# Altium PCB RF-Test-Board-Pcb.PcbDoc
Units mm, origin at the board's own origin, x right, y up, seen from the top; angles counter-clockwise.
Board outline 50 x 100 mm, 4 copper layers (Top Layer, GND, Power, Bottom Layer), stack 1.572 mm thick; 98 components, 45 nets, 257 pads, 494 vias.
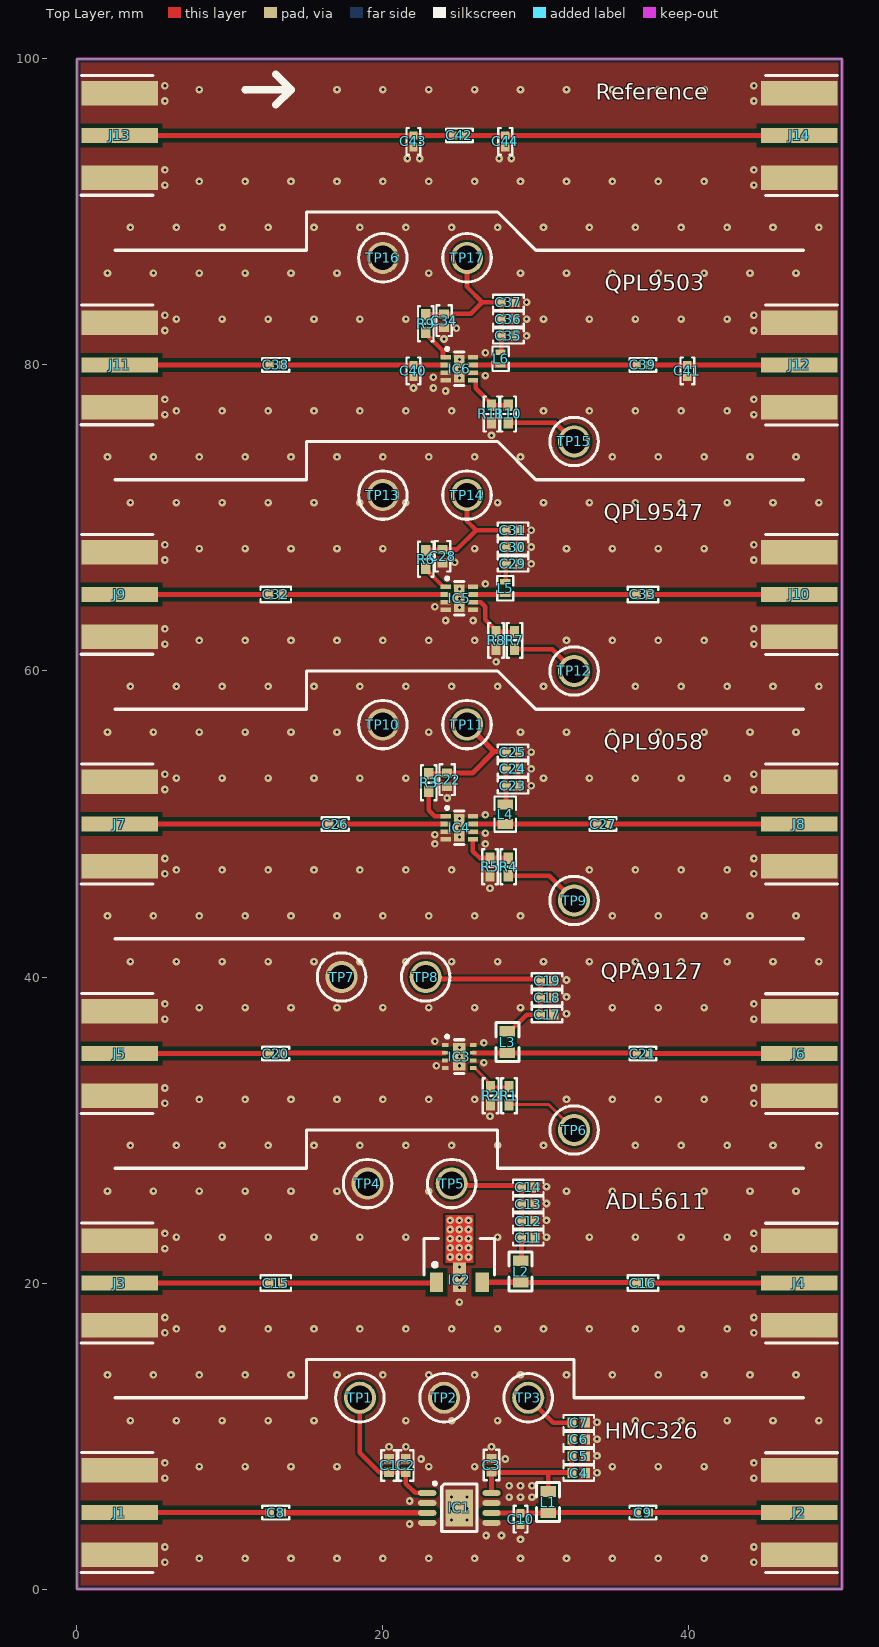
[diagram p0: Top Layer view]
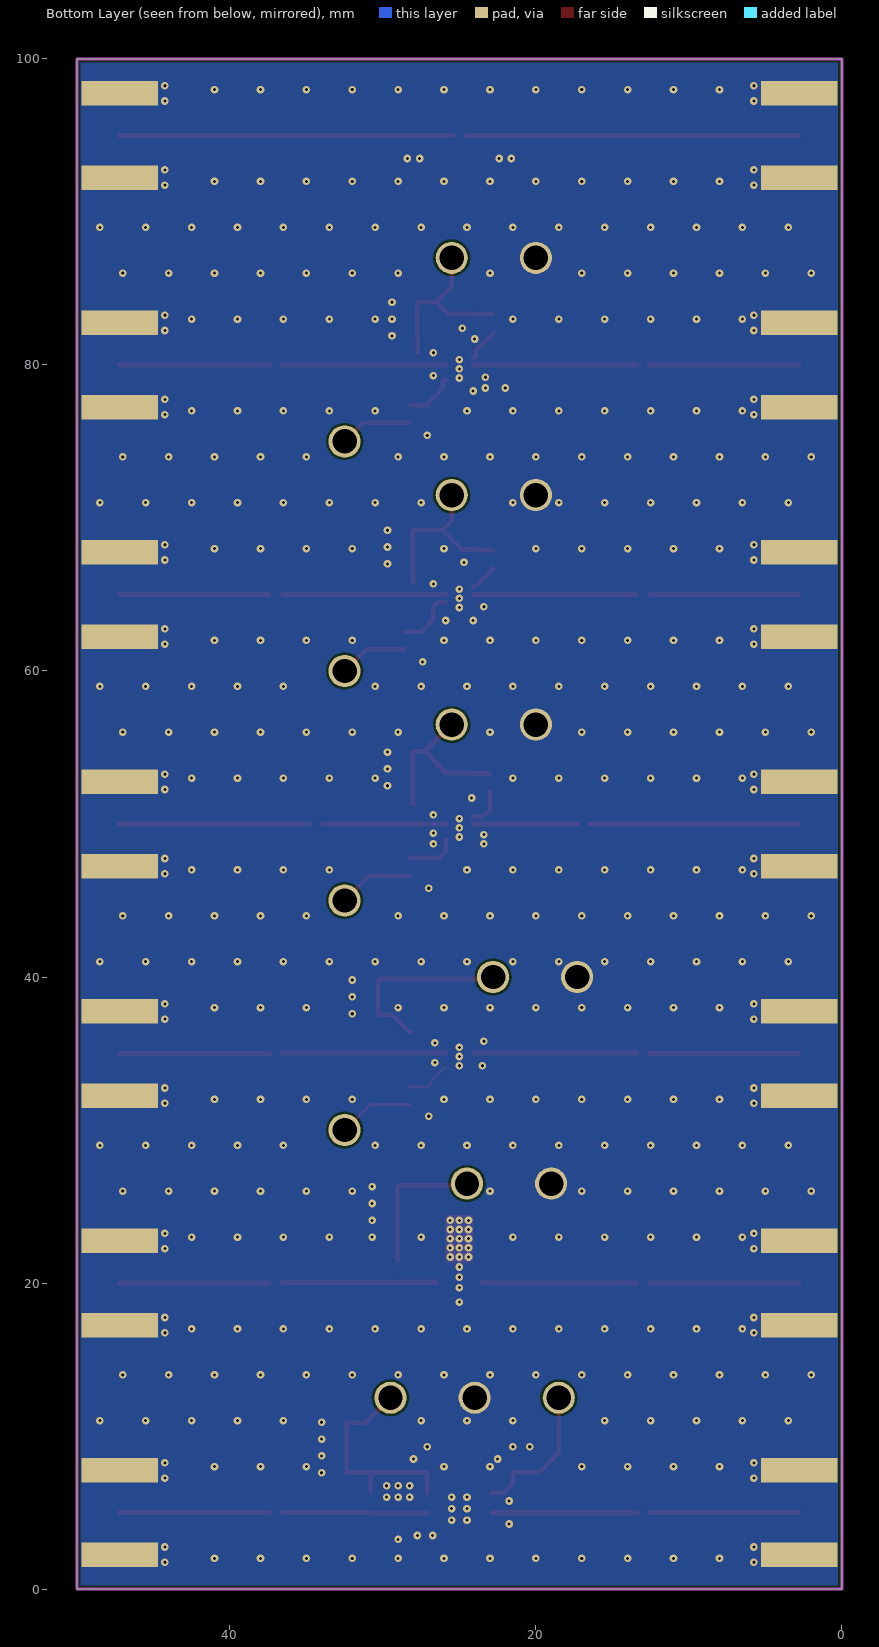
[diagram p1: Bottom Layer view, seen from below]
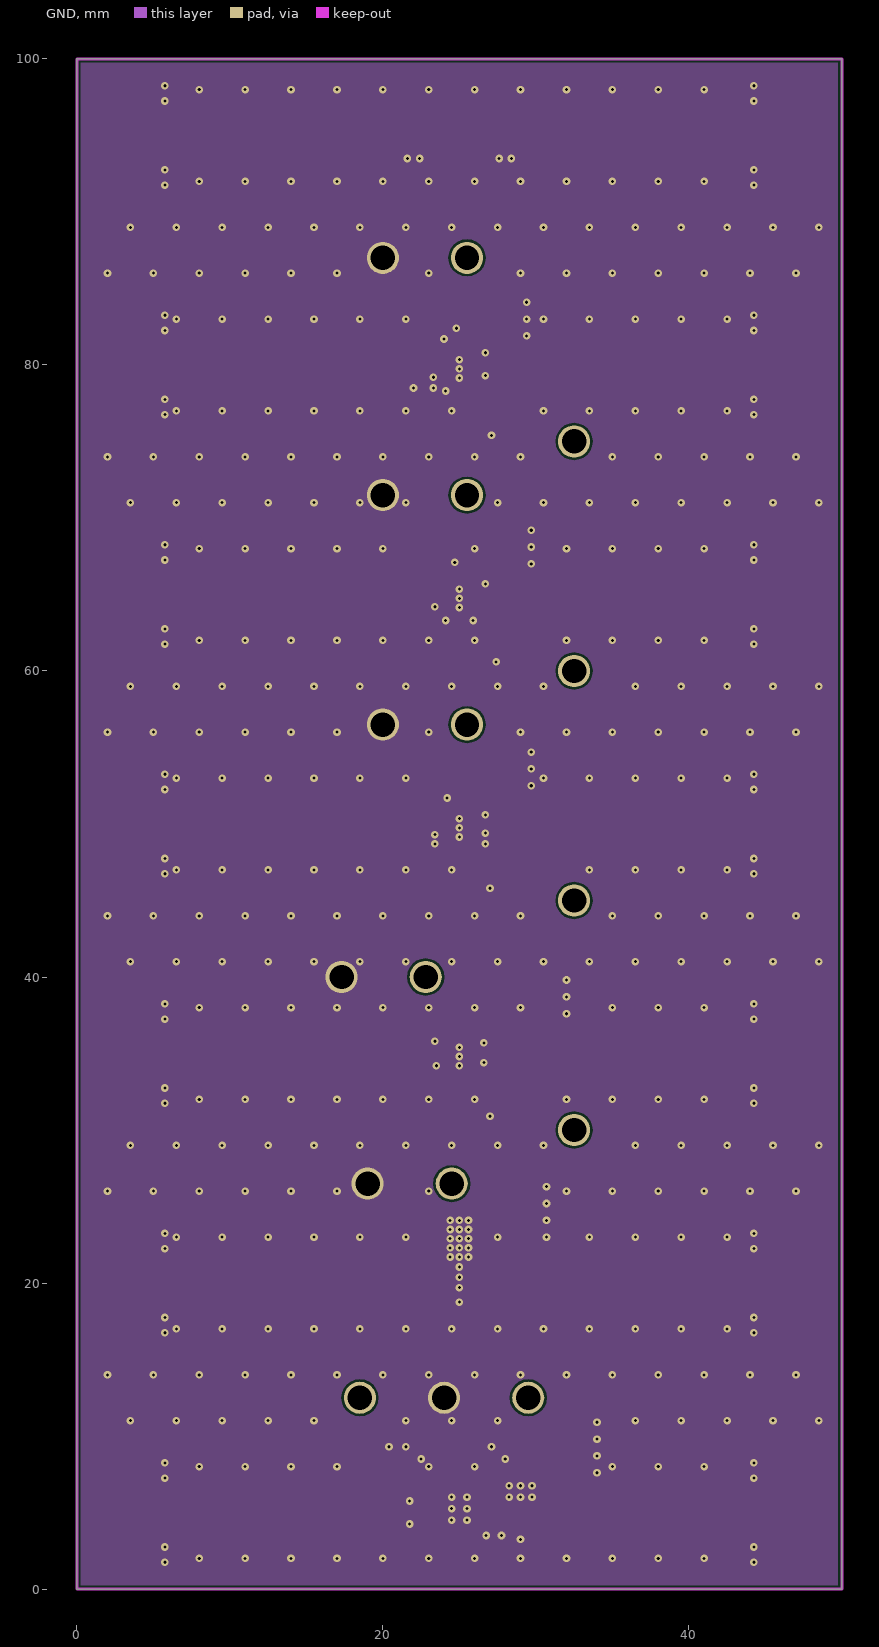
[diagram p2: GND]

## Layer stack, top to bottom
Top Solder: solder mask 0.0203, JLCPCB-SolderMask, Dk 3.8
Top Layer: signal copper 0.0356
Dielectric 2: prepreg 0.2, JLC7628, Dk 4.6
GND: signal copper 0.018
Dielectric 1: core 1.065, JLPCB-CORE, Dk 4.6
Power: signal copper 0.018
Dielectric 3: prepreg 0.2, JLC7628, Dk 4.6
Bottom Layer: signal copper 0.0356
Bottom Solder: solder mask 0.0203, JLCPCB-SolderMask, Dk 3.8

## Board outline
0,0 50,0 50,100 0,100

## Design rules (kind name [scope] priority, off if disabled: settings)
BoardOutlineClearance [All] p1: gap=0.15 ignorepadtopadclearanceinfootprint=FALSE
Clearance Clearance_RF [InNetClass('RF_50Z')] p1: gap=0.15 ignorepadtopadclearanceinfootprint=FALSE except(0.3: Arc-Fill Arc-Poly Arc-Region Track-Fill Track-Poly Track-Region SMDPad-Fill SMDPad-Poly SMDPad-Region THPad-Fill THPad-Poly THPad-Region Via-Fill Via-Poly Via-Region Fill-Fill Fill-Poly Fill-Region Poly-Poly Poly-Region Region-Region)
Clearance [All] p2: gap=0.15 ignorepadtopadclearanceinfootprint=FALSE
HoleSize [All] p1: absolutevalues=TRUE maxlimit=6.3 minlimit=0.2 maxpercent=80.000 minpercent=20.000
HoleToHoleClearance [All] p1: gap=0.25 allowstackedmicrovias=TRUE
MinimumSolderMaskSliver [All] p1: minsoldermaskwidth=0.03
PlaneClearance [All] p1: clearance=0.25
PlaneConnect [All] p1: planeconnectstyle=Direct reliefexpansion=0.508 reliefentries=4 reliefconductorwidth=0.254 reliefairgap=0.254
PolygonConnect [All] p1: connectstyle=Direct reliefconductorwidth=0.254 reliefentries=4 polygonreliefangle="90 Angle" airgapwidth=0.254
RoutingVias [All] p1: holewidth=0.2 width=0.5 viastyle="Through Hole" minholewidth=0.2 minwidth=0.5 maxholewidth=0.5 maxwidth=0.8
SilkToSolderMaskClearance [IsPad] p1: minsilkscreentomaskgap=0.05 clearancetoexposedcopper=TRUE
SolderMaskExpansion [All] p1: expansion=0.1 istentingtop=FALSE
Width Width_RF [InNetClass('RF_50Z')] p1: maxlimit=0.33 minlimit=0.254 preferedwidth=0.33 toplayer_minwidth=0.33 bottomlayer_minwidth=0.33 impedanceprofiledriven=TRUE impedanceprofileid={54A6BA53-0861-47FA-A180-C08008A3F4AD} impedanceprofilevalue=50.000000 minimp=50.000000 maximp=50.000000 favimp=50.000000
Width [All] p2: maxlimit=5 minlimit=0.15 preferedwidth=0.2
24 further rules are at their usual default settings.

## Classes and differential pairs
component class RF-Test-Board-Sch: C42 C43 C44 J13 J14
net class RF_50Z: NetC8_1 NetC8_2 NetC9_1 NetC9_2 NetC15_1 NetC15_2 NetC16_1 NetC16_2 NetC20_1 NetC20_2 NetC21_1 NetC21_2 NetC26_1 NetC26_2 NetC27_1 NetC27_2 NetC32_1 NetC32_2 NetC33_1 NetC33_2 NetC38_1 NetC38_2 NetC39_1 NetC39_2 NetC42_1 NetC42_2
component class U_QPL9547: C28 C29 C30 C31 C32 C33 IC5 J9 J10 L5 R6 R7 R8 TP12 TP13 TP14
component class U_QPL9503: C34 C35 C36 C37 C38 C39 C40 C41 IC6 J11 J12 L6 R9 R10 R11 TP15 TP16 TP17
component class U_QPL9058: C22 C23 C24 C25 C26 C27 IC4 J7 J8 L4 R3 R4 R5 TP9 TP10 TP11
component class U_QPA9127: C17 C18 C19 C20 C21 IC3 J5 J6 L3 R1 R2 TP6 TP7 TP8
component class U_HMC326: C1 C2 C3 C4 C5 C6 C7 C8 C9 C10 IC1 J1 J2 L1 TP1 TP2 TP3
component class U_ADL5611: C11 C12 C13 C14 C15 C16 IC2 J3 J4 L2 TP4 TP5

## Components (designator, comment, footprint, x,y, rotation, side; value= is the part's Value field where it differs from the comment)
C1 "0.1µF" "CAP 0402_1005" 20.4,8.075 r270 top
C2 "330pF" "CAP 0402_1005" 21.5,8.075 r270 top
C3 "330pF" "CAP 0402_1005" 27.1,8.1 r270 top
C4 "330pF" "CAP 0402_1005" 32.8,7.575 r180 top
C5 "0.1µF" "CAP 0402_1005" 32.8,8.675 r180 top
C6 "2.2µF" "CAP 0402_1005" 32.8,9.775 r180 top
C7 "2.2µF" "CAP 0402_1005" 32.8,10.875 r180 top
C8 "3pF" "CAP 0402_1005 RF" 13,5 r180 top
C9 "3pF" "CAP 0402_1005 RF" 37,5 r0 top
C10 "0.7pF" "CAP 0402_1005 RF" 29,4.575 r90 top
C11 "68pF" "CAP 0402_1005" 29.5,22.95 r180 top
C12 "1200pF" "CAP 0402_1005" 29.5,24.05 r180 top
C13 "0.1µF" "CAP 0402_1005" 29.5,25.15 r180 top
C14 "1µF" "CAP 0402_1005" 29.5,26.25 r180 top
C15 "0.1µF" "CAP 0402_1005" 13,20 r180 top
C16 "0.1µF" "CAP 0402_1005" 37,20 r180 top
C17 "1000pF" "CAP 0402_1005" 30.734,37.541 r180 top
C18 "0.1µF" "CAP 0402_1005" 30.734,38.641 r180 top
C19 "1µF" "CAP 0402_1005" 30.734,39.741 r180 top
C20 "10pF" "CAP 0402_1005 RF" 13,35 r0 top
C21 "10pF" "CAP 0402_1005 RF" 37,35 r0 top
C22 "1000pF" "CAP 0402_1005" 24.2,52.9 r270 top
C23 "1000pF" "CAP 0402_1005" 28.5,52.5 r180 top
C24 "0.1µF" "CAP 0402_1005" 28.5,53.6 r180 top
C25 "1µF" "CAP 0402_1005" 28.5,54.7 r180 top
C26 "15pF" "CAP 0402_1005 RF" 16.89,50 r0 top
C27 "15pF" "CAP 0402_1005 RF" 34.39,50 r0 top
C28 "100pF" "CAP 0402_1005" 23.9,67.5 r90 top
C29 "100pF" "CAP 0402_1005" 28.5,67 r180 top
C30 "0.1µF" "CAP 0402_1005" 28.5,68.1 r180 top
C31 "1µF" "CAP 0402_1005" 28.5,69.2 r180 top
C32 "100pF" "CAP 0402_1005" 13,65 r0 top
C33 "100pF" "CAP 0402_1005" 37,65 r0 top
C34 "100pF" "CAP 0402_1005" 24,82.9 r270 top
C35 "100pF" "CAP 0402_1005" 28.2,81.9 r180 top
C36 "0.1µF" "CAP 0402_1005" 28.2,83 r180 top
C37 "1µF" "CAP 0402_1005" 28.2,84.1 r180 top
C38 "10pF" "CAP 0402_1005 RF" 13,80 r0 top
C39 "5.6pF" "CAP 0402_1005 RF" 37,80 r0 top
C40 "0.2pF" "CAP 0402_1005 RF" 22,79.61 r90 top
C41 "0.4pF" "CAP 0402_1005 RF" 39.9,79.61 r90 top
C42 "3pF" "CAP 0402_1005 RF" 25,95 r180 top
C43 "3pF" "CAP 0402_1005 RF" 22,94.61 r90 top
C44 "3pF" "CAP 0402_1005 RF" 28,94.61 r90 top
IC1 "HMC326MS8GE" "ANALOG MSOP8G 3x3MM" 25,5.3 r0 top
IC2 "ADL5611" "Analog SOT-89" 25,20.5 r0 top
IC3 "QPA9127" "Qorvo PA DFN-8 2X2" 25,34.8 r0 top
IC4 "QPL9058" "Qorvo LNA DFN-8 2X2" 25,49.75 r270 top
IC5 "QPL9547" "Qorvo LNA DFN-8 2X2" 25,64.75 r270 top
IC6 "QPL9503" "Qorvo LNA DFN-8 2X2" 25,79.75 r270 top
J1 "CON-SMA-EDGE-S" CON-SMA-EDGE-S 0,5 r90 top
J2 "CON-SMA-EDGE-S" CON-SMA-EDGE-S 50,5 r270 top
J3 "CON-SMA-EDGE-S" CON-SMA-EDGE-S 0,20 r90 top
J4 "CON-SMA-EDGE-S" CON-SMA-EDGE-S 50,20 r270 top
J5 "CON-SMA-EDGE-S" CON-SMA-EDGE-S 0,35 r90 top
J6 "CON-SMA-EDGE-S" CON-SMA-EDGE-S 50,35 r270 top
J7 "CON-SMA-EDGE-S" CON-SMA-EDGE-S 0,50 r90 top
J8 "CON-SMA-EDGE-S" CON-SMA-EDGE-S 50,50 r270 top
J9 "CON-SMA-EDGE-S" CON-SMA-EDGE-S 0,65 r90 top
J10 "CON-SMA-EDGE-S" CON-SMA-EDGE-S 50,65 r270 top
J11 "CON-SMA-EDGE-S" CON-SMA-EDGE-S 0,80 r90 top
J12 "CON-SMA-EDGE-S" CON-SMA-EDGE-S 50,80 r270 top
J13 "CON-SMA-EDGE-S" CON-SMA-EDGE-S 0,95 r90 top
J14 "CON-SMA-EDGE-S" CON-SMA-EDGE-S 50,95 r270 top
L1 "3.3nH" 0603HP 30.8,5.675 r90 top
L2 "43nH" 0603HP 29,20.75 r90 top
L3 "12nH" 0603HP 28.134,35.741 r90 top
L4 "18nH" 0603CS 28,50.64 r90 top
L5 "18nH" 0402CS 28,65.41 r90 top
L6 "18nH" 0402CS 27.7,80.41 r90 top
R1 "=Value" "RES 0402_1005" 28.244,32.241 r90 top
R2 "220 kOhms" "RES 0402_1005" 27.044,32.241 r90 top
R3 "3.83 kOhms" "RES 0402_1005" 23,52.7 r90 top
R4 "=Value" "RES 0402_1005" 28.2,47.2 r90 top
R5 "220 kOhms" "RES 0402_1005" 27,47.2 r90 top
R6 "3.32 kOhms" "RES 0402_1005" 22.8,67.3 r90 top
R7 "=Value" "RES 0402_1005" 28.6,62 r90 top
R8 "100 kOhms" "RES 0402_1005" 27.4,62 r90 top
R9 "4.3 kOhms" "RES 0402_1005" 22.8,82.7 r90 top
R10 "=Value" "RES 0402_1005" 28.2,76.8 r90 top
R11 "20 kOhms" "RES 0402_1005" 27.1,76.8 r90 top
TP1 "Test Point-THM" KEYSTONE-THM-TestPoint 18.5,12.5 r0 top
TP2 "Test Point-THM" KEYSTONE-THM-TestPoint 24,12.5 r0 top
TP3 "Test Point-THM" KEYSTONE-THM-TestPoint 29.5,12.5 r0 top
TP4 "Test Point-THM" KEYSTONE-THM-TestPoint 19,26.5 r0 top
TP5 "Test Point-THM" KEYSTONE-THM-TestPoint 24.5,26.5 r0 top
TP6 "Test Point-THM" KEYSTONE-THM-TestPoint 32.5,30 r0 top
TP7 "Test Point-THM" KEYSTONE-THM-TestPoint 17.3,40 r0 top
TP8 "Test Point-THM" KEYSTONE-THM-TestPoint 22.8,40 r0 top
TP9 "Test Point-THM" KEYSTONE-THM-TestPoint 32.5,45 r0 top
TP10 "Test Point-THM" KEYSTONE-THM-TestPoint 20,56.5 r0 top
TP11 "Test Point-THM" KEYSTONE-THM-TestPoint 25.5,56.5 r0 top
TP12 "Test Point-THM" KEYSTONE-THM-TestPoint 32.5,60 r0 top
TP13 "Test Point-THM" KEYSTONE-THM-TestPoint 20,71.5 r0 top
TP14 "Test Point-THM" KEYSTONE-THM-TestPoint 25.5,71.5 r0 top
TP15 "Test Point-THM" KEYSTONE-THM-TestPoint 32.5,75 r0 top
TP16 "Test Point-THM" KEYSTONE-THM-TestPoint 20,87 r0 top
TP17 "Test Point-THM" KEYSTONE-THM-TestPoint 25.5,87 r0 top

## Footprints (in the part's own frame and the unit in brackets; to place one, negate y for a bottom-side part, rotate by r counter-clockwise, add the part's x,y. Pads: shape width x height; smd on the part's side, far side on the other; paste and mask are expansions set on the pad)
0402CS [mm] "Coilcraft Chip Inductor"
  rect 0.36x0.66 smd: 1(-0.41,0) 2(0.41,0)
  silkscreen extent -0.8,-0.53 0.8,0.53, body extent -0.59,-0.32 0.59,0.32, height 0.65
0603CS [mm] "Coilcraft Chip Inductor"
  rect 0.64x1.02 smd: 1(-0.64,0) 2(0.64,0)
  silkscreen extent -1.15,-0.7 1.15,0.7, body extent -0.9,-0.56 0.9,0.56, height 1.01
0603HP [mm] "Coilcraft Chip Inductor"
  rect 0.69x1.02 smd: 1(-0.7,0) 2(0.7,0)
  silkscreen extent -1.28,-0.75 1.28,0.75, body extent -0.88,-0.54 0.87,0.55, height 0.93
"ANALOG MSOP8G 3x3MM" [mm] "MSOP, 8-Leads, Body 3.00x3.00mm, Pitch 0.65mm, IPC Medium Density"
  oval 1.2x0.38 smd: 1(-2.1,0.975) 2(-2.1,0.325) 3(-2.1,-0.325) 4(-2.1,-0.975) 5(2.1,-0.975) 6(2.1,-0.325) 7(2.1,0.325) 8(2.1,0.975)
  rect 1.78x2.41 smd: 2(0,0)
  silkscreen extent -1.7,-1.55 1.15,1.7, body extent -2.46,-1.5 2.46,1.5, height 0.96
"Analog SOT-89" [mm] "SOT89, 3-Leads, Body 4.50x2.50mm, Pitch 1.50mm, Lead Span 3.3mm, IPC Medium Density"
  rect 0.86x1.3 smd: 1(-1.5,-0.45) 3(1.5,-0.45)
  rect 0.86x1.95 smd: 2(0,-0.125)
  Top Layer region: -0.9,0.825 -0.9,3.925 0.9,3.925 0.9,0.825
  silkscreen extent -2.3,0.02 2.3,2.4, body extent -2.25,-0.87 2.25,3.28, height 1.5
"CAP 0402_1005" [mm] "Chip Capacitor, 2-Leads, Body 1.02x0.51mm, IPC Medium Density"
  rect 0.6x0.64 smd: 1(-0.44,0) 2(0.44,0)
  silkscreen extent -1,-0.5 1,0.5, body extent -0.5,-0.26 0.5,0.26, height 0.52
"CAP 0402_1005 RF" [mm] "Chip Capacitor, 2-Leads, Body 1.02x0.51mm, IPC High Density"
  rect 0.55x0.54 smd: 1(-0.39,0) 2(0.39,0)
  silkscreen extent -0.87,-0.45 0.87,0.45, body extent -0.5,-0.26 0.5,0.26, height 0.52
CON-SMA-EDGE-S [mm]
  rect 1x5 smd: 1(0,-2.8)
  rect 1.6x5 smd: 2(-2.77,-2.8) 2(2.77,-2.8)
  rect 1.6x5 smd far side: 2(-2.77,-2.8) 2(2.77,-2.8)
  silkscreen extent -3.91,-4.99 3.93,-0.29, body extent -3.17,-3.77 3.18,9.56, height 3.55
KEYSTONE-THM-TestPoint [mm] "Test Point, Dia 3.17mm"
  round 2.1 hole 1.6: 1(0,0)
  silkscreen extent -1.59,-1.58 1.59,1.58, body extent -1.59,-1.59 1.59,1.59, height 8.13
"Qorvo LNA DFN-8 2X2" [mm] "DFN-8, 8-Leads, Body 2x2mm, Pitch 0.5mm, STM LMX358IQ2T"
  rect 0.3x0.67 smd mask+0.1: 1(-0.75,-0.885) 2(-0.25,-0.885) 3(0.25,-0.885) 4(0.75,-0.885) 5(0.75,0.885) 6(0.25,0.885) 7(-0.25,0.885) 8(-0.75,0.885)
  rect 1.8x0.7 smd mask+0.1: 9(0,0)
  silkscreen extent -1.4,-0.9 1.1,0.3, body extent -1,-1 1,1, height 0.6
"Qorvo PA DFN-8 2X2" [mm] "DFN-8, 8-Leads, Body 2x2mm, Pitch 0.5mm, STM LMX358IQ2T"
  rect 0.43x0.25 smd mask+0.05: 1(-0.915,0.75) 2(-0.915,0.25) 3(-0.915,-0.25) 4(-0.915,-0.75) 5(0.915,-0.75) 6(0.915,-0.25) 7(0.915,0.25) 8(0.915,0.75)
  rect 0.8x1.8 smd mask+0.05: 9(0,0)
  silkscreen extent -0.9,-1.1 0.3,1.4, body extent -1,-1 1,1, height 0.6
"RES 0402_1005" [mm] "Chip Resistor, 2-Leads, Body 1.0x0.5mm, IPC Medium Density"
  rect 0.75x0.6 smd: 1(-0.575,0) 2(0.575,0)
  silkscreen extent -1.14,-0.51 1.14,0.51, body extent -0.5,-0.25 0.5,0.25, height 0.35

## Part data
C1 C5 C13 C15 C16 C18 C24 C30 C36: library part EMK105B7104KV-F, "CAP CER 0.1UF 16V X7R 0402", Device Package="0402 (1005 Metric)", Manufacturer="Taiyo Yuden", Operating Temperature="-55°C ~ 125°C", Supplier Part Number 1=587-1451-1-ND, Temperature Coefficient=X7R, Tolerance=±10%, Voltage - Rated=16V, Applications="General Purpose", Capacitance=0.1µF, ComponentLink1Description=Datasheet, ComponentLink1URL="https://ds.yuden.co.jp/TYCOMPAS/ut/detail?pn=EMK105B7104KV-F  &u=M", ComponentLink2Description="DigiKey Link", ComponentLink2URL=http://digikey.com/product-detail/en/taiyo-yuden/EMK105B7104KV-F/587-1451-1-ND/1004082, LastUpdated="2.09.2020 01:02:15", Lifecycle Status=Active, Minimum Order=1, Mounting Type="Surface Mount, MLCC", Package / Case="0402 (1005 Metric)", Packaging=CutTape, Part Number=EMK105B7104KV-F, Part Status=Active, PartId=6070, Price=0.10, Series=M, Size / Dimension="0.039\" L x 0.020\" W (1.00mm x 0.50mm)", Supplier 1=DigiKey, Thickness (Max)="0.022\" (0.55mm)"
C2 C3 C4: library part CL05B331KB5NNNC, "CAP CER 330PF 50V X7R 0402", Device Package="0402 (1005 Metric)", Manufacturer="Samsung Electro-Mechanics", Operating Temperature="-55°C ~ 125°C", Supplier Part Number 1=1276-1546-1-ND, Temperature Coefficient=X7R, Tolerance=±10%, Voltage - Rated=50V, Applications="General Purpose", Capacitance=330pF, ComponentLink1Description=Datasheet, ComponentLink1URL=http://www.samsungsem.com/kr/support/product-search/mlcc/CL05B331KB5NNNC.jsp, ComponentLink2Description="DigiKey Link", ComponentLink2URL=http://digikey.com/product-detail/en/samsung-electro-mechanics/CL05B331KB5NNNC/1276-1546-1-ND/3889632, LastUpdated="2.09.2020 01:02:05", Lifecycle Status=Active, Minimum Order=1, Mounting Type="Surface Mount, MLCC", Package / Case="0402 (1005 Metric)", Packaging=TapeAndReel, Part Number=CL05B331KB5NNNC, Part Status=Active, PartId=10570, Price=0.01, Series=CL, Size / Dimension="0.039\" L x 0.020\" W (1.00mm x 0.50mm)", Supplier 1=DigiKey, Thickness (Max)="0.022\" (0.55mm)"
C6 C7: library part LMK105BJ225MV-F, "CAP CER 2.2UF 10V X5R 0402", Device Package="0402 (1005 Metric)", Manufacturer="Taiyo Yuden", Operating Temperature="-55°C ~ 85°C", Supplier Part Number 1=587-3153-1-ND, Temperature Coefficient=X5R, Tolerance=±20%, Voltage - Rated=10V, Applications="General Purpose", Capacitance=2.2µF, ComponentLink1Description=Datasheet, ComponentLink1URL=https://www.yuden.co.jp/productdata/catalog/mlcc01_e.pdf, ComponentLink2Description="DigiKey Link", ComponentLink2URL=http://digikey.com/product-detail/en/taiyo-yuden/LMK105BJ225MV-F/587-3153-1-ND/2774767, LastUpdated="2.09.2020 01:02:21", Lifecycle Status=Active, Minimum Order=1, Mounting Type="Surface Mount, MLCC", Package / Case="0402 (1005 Metric)", Packaging=TapeAndReel, Part Number=LMK105BJ225MV-F, Part Status=Active, PartId=3142, Price=0.01, Series=M, Size / Dimension="0.039\" L x 0.020\" W (1.00mm x 0.50mm)", Supplier 1=DigiKey, Thickness (Max)="0.022\" (0.55mm)"
C8 C9 C42 C43 C44: library part GJM1555C1H3R0CB01J, "CAP CER 3PF 50V C0G/NP0 0402", Device Package="0402 (1005 Metric)", Manufacturer="Murata Electronics", Operating Temperature="-55°C ~ 125°C", Supplier Part Number 1=490-8096-1-ND, Temperature Coefficient="C0G, NP0", Tolerance=±0.25pF, Voltage - Rated=50V, Applications="RF, Microwave, High Frequency", Capacitance=3pF, ComponentLink1Description=Datasheet, ComponentLink1URL=https://search.murata.co.jp/Ceramy/image/img/A01X/G101/ENG/GJM1555C1H3R0CB01-01.pdf, ComponentLink2Description="DigiKey Link", ComponentLink2URL=http://digikey.com/product-detail/en/murata-electronics/GJM1555C1H3R0CB01J/490-8096-1-ND/4380382, Features="High Q, Low Loss", LastUpdated="2.09.2020 01:17:08", Lifecycle Status=Active, Minimum Order=1, Mounting Type="Surface Mount, MLCC", Package / Case="0402 (1005 Metric)", Packaging=TapeAndReel, Part Number=GJM1555C1H3R0CB01J, Part Status=Active, PartId=492, Price=0.01, Series=GJM, Size / Dimension="0.039\" L x 0.020\" W (1.00mm x 0.50mm)", Supplier 1=DigiKey, Thickness (Max)="0.022\" (0.55mm)"
C10: library part GJM1555C1HR70BB01D, "CAP CER 0.7PF 50V C0G/NP0 0402", Device Package="0402 (1005 Metric)", Manufacturer="Murata Electronics", Operating Temperature="-55°C ~ 125°C", Supplier Part Number 1=490-6079-1-ND, Temperature Coefficient="C0G, NP0", Tolerance=±0.1pF, Voltage - Rated=50V, Applications="RF, Microwave, High Frequency", Capacitance=0.7pF, ComponentLink1Description=Datasheet, ComponentLink1URL=https://search.murata.co.jp/Ceramy/image/img/A01X/G101/ENG/GJM1555C1HR70BB01-01.pdf, ComponentLink2Description="DigiKey Link", ComponentLink2URL=http://digikey.com/product-detail/en/murata-electronics/GJM1555C1HR70BB01D/490-6079-1-ND/3845279, Features="High Q, Low Loss", LastUpdated="2.09.2020 01:17:05", Lifecycle Status=Active, Minimum Order=1, Mounting Type="Surface Mount, MLCC", Package / Case="0402 (1005 Metric)", Packaging=TapeAndReel, Part Number=GJM1555C1HR70BB01D, Part Status=Active, PartId=1691, Price=0.03, Series=GJM, Size / Dimension="0.039\" L x 0.020\" W (1.00mm x 0.50mm)", Supplier 1=DigiKey, Thickness (Max)="0.022\" (0.55mm)"
C11: library part GCM1555C1H680JA16D, "CAP CER 68PF 50V C0G/NP0 0402", Device Package="0402 (1005 Metric)", Manufacturer="Murata Electronics", Operating Temperature="-55°C ~ 125°C", Ratings=AEC-Q200, Supplier Part Number 1=490-12653-1-ND, Temperature Coefficient="C0G, NP0", Tolerance=±5%, Voltage - Rated=50V, Applications=Automotive, Capacitance=68pF, ComponentLink1Description=Datasheet, ComponentLink1URL=https://www.murata.com/~/media/webrenewal/support/library/catalog/products/capacitor/mlcc/c03e.ashx?la=en-us, ComponentLink2Description="DigiKey Link", ComponentLink2URL=http://digikey.com/product-detail/en/murata-electronics/GCM1555C1H680JA16D/490-12653-1-ND/5797622, LastUpdated="2.09.2020 01:02:15", Lifecycle Status=Active, Minimum Order=1, Mounting Type="Surface Mount, MLCC", Package / Case="0402 (1005 Metric)", Packaging=TapeAndReel, Part Number=GCM1555C1H680JA16D, Part Status=Active, PartId=5827, Price=0.01, Series=GCM, Size / Dimension="0.039\" L x 0.020\" W (1.00mm x 0.50mm)", Supplier 1=DigiKey, Thickness (Max)="0.022\" (0.55mm)"
C12: library part GCM155R71H122JA37D, "CAP CER 1200PF 50V X7R 0402", Device Package="0402 (1005 Metric)", Manufacturer="Murata Electronics", Operating Temperature="-55°C ~ 125°C", Ratings=AEC-Q200, Supplier Part Number 1=490-17759-1-ND, Temperature Coefficient=X7R, Tolerance=±5%, Voltage - Rated=50V, Applications=Automotive, Capacitance=1200pF, ComponentLink1Description=Datasheet, ComponentLink1URL=https://search.murata.co.jp/Ceramy/image/img/A01X/G101/ENG/GCM155R71H122JA37-01.pdf, ComponentLink2Description="DigiKey Link", ComponentLink2URL=http://digikey.com/product-detail/en/murata-electronics/GCM155R71H122JA37D/490-17759-1-ND/8539995, LastUpdated="2.09.2020 01:02:22", Lifecycle Status=Active, Minimum Order=1, Mounting Type="Surface Mount, MLCC", Package / Case="0402 (1005 Metric)", Packaging=TapeAndReel, Part Number=GCM155R71H122JA37D, Part Status=Active, PartId=2713, Price=0.01, Series=GCM, Size / Dimension="0.039\" L x 0.020\" W (1.00mm x 0.50mm)", Supplier 1=DigiKey, Thickness (Max)="0.022\" (0.55mm)"
C14 C19 C25 C31 C37: library part CL05A105KP5NNNC, "CAP CER 1UF 10V X5R 0402", Device Package="0402 (1005 Metric)", Manufacturer="Samsung Electro-Mechanics", Operating Temperature="-55°C ~ 85°C", Supplier Part Number 1=1276-1076-1-ND, Temperature Coefficient=X5R, Tolerance=±10%, Voltage - Rated=10V, Applications="General Purpose", Capacitance=1µF, ComponentLink1Description=Datasheet, ComponentLink1URL=http://www.samsungsem.com/kr/support/product-search/mlcc/CL05A105KP5NNNC.jsp, ComponentLink2Description="DigiKey Link", ComponentLink2URL=http://digikey.com/product-detail/en/samsung-electro-mechanics/CL05A105KP5NNNC/1276-1076-1-ND/3889162, LastUpdated="2.09.2020 01:02:21", Lifecycle Status=Active, Minimum Order=1, Mounting Type="Surface Mount, MLCC", Package / Case="0402 (1005 Metric)", Packaging=TapeAndReel, Part Number=CL05A105KP5NNNC, Part Status=Active, PartId=3103, Price=0.01, Series=CL, Size / Dimension="0.039\" L x 0.020\" W (1.00mm x 0.50mm)", Supplier 1=DigiKey, Thickness (Max)="0.022\" (0.55mm)"
C17 C22 C23: library part GCM155R71H102KA37D, "CAP CER 1000PF 50V X7R 0402", Device Package="0402 (1005 Metric)", Manufacturer="Murata Electronics", Operating Temperature="-55°C ~ 125°C", Ratings=AEC-Q200, Supplier Part Number 1=490-4761-1-ND, Temperature Coefficient=X7R, Tolerance=±10%, Voltage - Rated=50V, Applications=Automotive, Capacitance=1000pF, ComponentLink1Description=Datasheet, ComponentLink1URL=https://psearch.en.murata.com/capacitor/product/GCM155R71H102KA37%23.pdf, ComponentLink2Description="DigiKey Link", ComponentLink2URL=http://digikey.com/product-detail/en/murata-electronics/GCM155R71H102KA37D/490-4761-1-ND/1641680, LastUpdated="2.09.2020 01:01:39", Lifecycle Status=Active, Minimum Order=1, Mounting Type="Surface Mount, MLCC", Package / Case="0402 (1005 Metric)", Packaging=TapeAndReel, Part Number=GCM155R71H102KA37D, Part Status=Active, PartId=12579, Price=0.01, Series=GCM, Size / Dimension="0.039\" L x 0.020\" W (1.00mm x 0.50mm)", Supplier 1=DigiKey, Thickness (Max)="0.022\" (0.55mm)"
C20 C21 C38: library part GJM1555C1H100FB01D, "CAP CER 10PF 50V C0G/NP0 0402", Device Package="0402 (1005 Metric)", Manufacturer="Murata Electronics", Operating Temperature="-55°C ~ 125°C", Supplier Part Number 1=490-11189-1-ND, Temperature Coefficient="C0G, NP0", Tolerance=±1%, Voltage - Rated=50V, Applications="RF, Microwave, High Frequency", Capacitance=10pF, ComponentLink1Description=Datasheet, ComponentLink1URL=https://search.murata.co.jp/Ceramy/image/img/A01X/G101/ENG/GJM1555C1H100FB01-01.pdf, ComponentLink2Description="DigiKey Link", ComponentLink2URL=http://digikey.com/product-detail/en/murata-electronics/GJM1555C1H100FB01D/490-11189-1-ND/5333029, Features="High Q, Low Loss", LastUpdated="2.09.2020 01:17:07", Lifecycle Status=Active, Minimum Order=1, Mounting Type="Surface Mount, MLCC", Package / Case="0402 (1005 Metric)", Packaging=TapeAndReel, Part Number=GJM1555C1H100FB01D, Part Status=Active, PartId=560, Price=0.04, Series=GJM, Size / Dimension="0.039\" L x 0.020\" W (1.00mm x 0.50mm)", Supplier 1=DigiKey, Thickness (Max)="0.022\" (0.55mm)"
C26 C27: library part GJM1555C1H150JB01D, "CAP CER 15PF 50V C0G/NP0 0402", Device Package="0402 (1005 Metric)", Manufacturer="Murata Electronics", Operating Temperature="-55°C ~ 125°C", Supplier Part Number 1=490-3117-1-ND, Temperature Coefficient="C0G, NP0", Tolerance=±5%, Voltage - Rated=50V, Applications="RF, Microwave, High Frequency", Capacitance=15pF, ComponentLink1Description=Datasheet, ComponentLink1URL=https://search.murata.co.jp/Ceramy/image/img/A01X/G101/ENG/GJM1555C1H150JB01-01.pdf, ComponentLink2Description="DigiKey Link", ComponentLink2URL=http://digikey.com/product-detail/en/murata-electronics/GJM1555C1H150JB01D/490-3117-1-ND/702383, Features="High Q, Low Loss", LastUpdated="2.09.2020 01:17:07", Lifecycle Status=Active, Minimum Order=1, Mounting Type="Surface Mount, MLCC", Package / Case="0402 (1005 Metric)", Packaging=TapeAndReel, Part Number=GJM1555C1H150JB01D, Part Status=Active, PartId=692, Price=0.04, Series=GJM, Size / Dimension="0.039\" L x 0.020\" W (1.00mm x 0.50mm)", Supplier 1=DigiKey, Thickness (Max)="0.022\" (0.55mm)"
C28 C29 C32 C33 C34 C35: library part GCM1555C1H101FA16D, "CAP CER 100PF 50V C0G/NP0 0402", Device Package="0402 (1005 Metric)", Manufacturer="Murata Electronics", Operating Temperature="-55°C ~ 125°C", Ratings=AEC-Q200, Supplier Part Number 1=490-14349-1-ND, Temperature Coefficient="C0G, NP0", Tolerance=±1%, Voltage - Rated=50V, Applications=Automotive, Capacitance=100pF, ComponentLink1Description=Datasheet, ComponentLink1URL=https://search.murata.co.jp/Ceramy/image/img/A01X/G101/ENG/GCM1555C1H101FA16-01.pdf, ComponentLink2Description="DigiKey Link", ComponentLink2URL=http://digikey.com/product-detail/en/murata-electronics/GCM1555C1H101FA16D/490-14349-1-ND/6606810, LastUpdated="2.09.2020 01:02:12", Lifecycle Status=Active, Minimum Order=1, Mounting Type="Surface Mount, MLCC", Package / Case="0402 (1005 Metric)", Packaging=TapeAndReel, Part Number=GCM1555C1H101FA16D, Part Status=Active, PartId=7484, Price=0.02, Series=GCM, Size / Dimension="0.039\" L x 0.020\" W (1.00mm x 0.50mm)", Supplier 1=DigiKey, Thickness (Max)="0.022\" (0.55mm)"
C39: library part GJM1555C1H5R6CB01D, "CAP CER 5.6PF 50V C0G/NP0 0402", Device Package="0402 (1005 Metric)", Manufacturer="Murata Electronics", Operating Temperature="-55°C ~ 125°C", Supplier Part Number 1=490-3103-1-ND, Temperature Coefficient="C0G, NP0", Tolerance=±0.25pF, Voltage - Rated=50V, Applications="RF, Microwave, High Frequency", Capacitance=5.6pF, ComponentLink1Description=Datasheet, ComponentLink1URL=https://search.murata.co.jp/Ceramy/image/img/A01X/G101/ENG/GJM1555C1H5R6CB01-01.pdf, ComponentLink2Description="DigiKey Link", ComponentLink2URL=http://digikey.com/product-detail/en/murata-electronics/GJM1555C1H5R6CB01D/490-3103-1-ND/702369, Features="High Q, Low Loss", LastUpdated="2.09.2020 01:17:06", Lifecycle Status=Active, Minimum Order=1, Mounting Type="Surface Mount, MLCC", Package / Case="0402 (1005 Metric)", Packaging=TapeAndReel, Part Number=GJM1555C1H5R6CB01D, Part Status=Active, PartId=1253, Price=0.02, Series=GJM, Size / Dimension="0.039\" L x 0.020\" W (1.00mm x 0.50mm)", Supplier 1=DigiKey, Thickness (Max)="0.022\" (0.55mm)"
C40: library part GJM1555C1HR20WB01D, "CAP CER 0.2PF 50V C0G/NP0 0402", Device Package="0402 (1005 Metric)", Manufacturer="Murata Electronics", Operating Temperature="-55°C ~ 125°C", Supplier Part Number 1=490-11247-1-ND, Temperature Coefficient="C0G, NP0", Tolerance=±0.05pF, Voltage - Rated=50V, Applications="RF, Microwave, High Frequency", Capacitance=0.2pF, ComponentLink1Description=Datasheet, ComponentLink1URL=https://search.murata.co.jp/Ceramy/image/img/A01X/G101/ENG/GJM1555C1HR20WB01-01.pdf, ComponentLink2Description="DigiKey Link", ComponentLink2URL=http://digikey.com/product-detail/en/murata-electronics/GJM1555C1HR20WB01D/490-11247-1-ND/5333087, Features="High Q, Low Loss", LastUpdated="2.09.2020 01:17:04", Lifecycle Status=Active, Minimum Order=1, Mounting Type="Surface Mount, MLCC", Package / Case="0402 (1005 Metric)", Packaging=TapeAndReel, Part Number=GJM1555C1HR20WB01D, Part Status=Active, PartId=2057, Price=0.05, Series=GJM, Size / Dimension="0.039\" L x 0.020\" W (1.00mm x 0.50mm)", Supplier 1=DigiKey, Thickness (Max)="0.022\" (0.55mm)"
C41: library part GJM1555C1HR40BB01D, "CAP CER 0.4PF 50V C0G/NP0 0402", Device Package="0402 (1005 Metric)", Manufacturer="Murata Electronics", Operating Temperature="-55°C ~ 125°C", Supplier Part Number 1=490-3080-1-ND, Temperature Coefficient="C0G, NP0", Tolerance=±0.1pF, Voltage - Rated=50V, Applications="RF, Microwave, High Frequency", Capacitance=0.4pF, ComponentLink1Description=Datasheet, ComponentLink1URL=https://search.murata.co.jp/Ceramy/image/img/A01X/G101/ENG/GJM1555C1HR40BB01-01.pdf, ComponentLink2Description="DigiKey Link", ComponentLink2URL=http://digikey.com/product-detail/en/murata-electronics/GJM1555C1HR40BB01D/490-3080-1-ND/702346, Features="High Q, Low Loss", LastUpdated="2.09.2020 01:17:06", Lifecycle Status=Active, Minimum Order=1, Mounting Type="Surface Mount, MLCC", Package / Case="0402 (1005 Metric)", Packaging=TapeAndReel, Part Number=GJM1555C1HR40BB01D, Part Status=Active, PartId=1529, Price=0.03, Series=GJM, Size / Dimension="0.039\" L x 0.020\" W (1.00mm x 0.50mm)", Supplier 1=DigiKey, Thickness (Max)="0.022\" (0.55mm)"
IC1: "IC RF AMP GP 3GHZ-4.5GHZ 8MSOP", Supplier Part Number 1=1127-1333-ND, Part Number=HMC326MS8GE, Supplier 1=Digi-Key
IC2: "IC AMP W-CDMA 30MHZ-6GHZ SOT89-3", Supplier Part Number 1=ADL5611ARKZ-R7CT-ND, Part Number=ADL5611, Supplier 1=Digi-Key, Supplier 2=Mouser, Supplier Part Number 2=584-ADL5611ARKZ-R7
IC3: "High Linearity Gain Block", Supplier Part Number 1=772-QPA9127TR7, Part Number=QPA9127, Supplier 1=Mouser
IC4: "0.5 – 6.0 GHz Ultra Low-Noise LNA", Part Number=QPL9058, Supplier 1=RFMW, Supplier Part Number 1=QPL9058
IC5: "0.1 -6 GHz Ultra Low-Noise LNA", Supplier Part Number 1=772-QPL9547SR, Part Number=QPL9547, Supplier 1=Mouser
IC6: "Ultra Low-Noise, Flat Gain LNA", Supplier Part Number 1=772-QPL9503T, Part Number=QPL9503, Supplier 1=Mouser
J1 J2 J3 J4 J5 J6 J7 J8 J9 J10 J11 J12 J13 J14: "CONN SMA JACK STR EDGE MNT", Supplier Part Number 1=CON-SMA-EDGE-S-ND, Part Number=CON-SMA-EDGE-S, Supplier 1=Digi-Key, Supplier 2=Mouser, Supplier Part Number 2=223-CON-SMA-EDGE-S
L1: library part 0603HP-3N3XGLW, "Fixed Inductors 0603 3.3nH Unshld 2% 1.9A 24mOhms", Supplier Part Number 1=994-0603HP-3N3XGLW, Supplier 1=Mouser
L2: library part 0603HP-43NXGLW, "Fixed Inductors 0603 43nH Unshld 2% 810mA 170mOhms", Supplier Part Number 1=994-0603HP-43NXGLW, Supplier 1=Mouser
L3: library part 0603HP-12NXGLW, "Fixed Inductors 0603 12nH Unshld 2% 1.1A 88mOhms", Supplier Part Number 1=994-0603HP-12NXGLW, Supplier 1=Mouser
L4: library part 0603CS-18NXJLW, "Fixed Inductors 1608 18nH Unshld 5% 700mA 170mOhms AECQ2", Supplier Part Number 1=994-0603CS-18NXJLW, Supplier 1=Mouser
L5 L6: library part 0402CS-18NXJLW, "Fixed Inductors 1005 18nH Unshld 5% 420mA 230mOhms AECQ2", Supplier Part Number 1=994-0402CS-18NXJLW, Supplier 1=Mouser
R1 R4 R7 R10: library part RC0402JR-070RP, "RES SMD 0 OHM JUMPER 1/16W 0402", Device Package="0402 (1005 Metric)", Manufacturer=Yageo, Operating Temperature="-55°C ~ 155°C", Power (Watts)="0.063W, 1/16W", Supplier Device Package=0402, Supplier Part Number 1=YAG1279CT-ND, Tolerance=Jumper, ComponentLink1Description=Datasheet, ComponentLink1URL=http://www.yageo.com/NewPortal/yageodocoutput?fileName=/pdf/R-Chip/PYu-RC_51_RoHS_P_0.pdf, ComponentLink2Description="DigiKey Link", ComponentLink2URL=http://digikey.com/product-detail/en/yageo/RC0402JR-070RP/YAG1279CT-ND/4935394, Composition="Thick Film", Features="Moisture Resistant", Height - Seated (Max)="0.016\" (0.40mm)", LastUpdated="2.09.2020 01:07:33", Lifecycle Status=Active, Minimum Order=1, Number of Terminations=2, Package / Case="0402 (1005 Metric)", Packaging=CutTape, Part Number=RC0402JR-070RP, Part Status=Active, PartId=18920, Price=0.10, Series="RC-P Lead Free", Size / Dimension="0.039\" L x 0.020\" W (1.00mm x 0.50mm)", Supplier 1=DigiKey
R2 R5: library part RC0402FR-07220KL, "RES SMD 220K OHM 1% 1/16W 0402", Device Package="0402 (1005 Metric)", Manufacturer=Yageo, Operating Temperature="-55°C ~ 155°C", Power (Watts)="0.063W, 1/16W", Supplier Device Package=0402, Supplier Part Number 1=311-220KLRCT-ND, Temperature Coefficient=±100ppm/°C, Tolerance=±1%, ComponentLink1Description=Datasheet, ComponentLink1URL=https://www.yageo.com/upload/media/product/productsearch/datasheet/rchip/PYu-RC_Group_51_RoHS_L_10.pdf, ComponentLink2Description="DigiKey Link", ComponentLink2URL=http://digikey.com/product-detail/en/yageo/RC0402FR-07220KL/311-220KLRCT-ND/729511, Composition="Thick Film", Features="Moisture Resistant", Height - Seated (Max)="0.016\" (0.40mm)", LastUpdated="2.09.2020 01:08:10", Lifecycle Status=Active, Minimum Order=1, Number of Terminations=2, Package / Case="0402 (1005 Metric)", Packaging=CutTape, Part Number=RC0402FR-07220KL, Part Status=Active, PartId=2589, Price=0.10, Resistance="220 kOhms", Series=RC, Size / Dimension="0.039\" L x 0.020\" W (1.00mm x 0.50mm)", Supplier 1=DigiKey
R3: library part RC0402FR-073K83L, "RES SMD 3.83K OHM 1% 1/16W 0402", Device Package="0402 (1005 Metric)", Manufacturer=Yageo, Operating Temperature="-55°C ~ 155°C", Power (Watts)="0.063W, 1/16W", Supplier Device Package=0402, Supplier Part Number 1=311-3.83KLRCT-ND, Temperature Coefficient=±100ppm/°C, Tolerance=±1%, ComponentLink1Description=Datasheet, ComponentLink1URL=https://www.yageo.com/upload/media/product/productsearch/datasheet/rchip/PYu-RC_Group_51_RoHS_L_10.pdf, ComponentLink2Description="DigiKey Link", ComponentLink2URL=http://digikey.com/product-detail/en/yageo/RC0402FR-073K83L/311-3.83KLRCT-ND/2827952, Composition="Thick Film", Features="Moisture Resistant", Height - Seated (Max)="0.016\" (0.40mm)", LastUpdated="2.09.2020 01:07:27", Lifecycle Status=Active, Minimum Order=1, Number of Terminations=2, Package / Case="0402 (1005 Metric)", Packaging=CutTape, Part Number=RC0402FR-073K83L, Part Status=Active, PartId=20859, Price=0.10, Resistance="3.83 kOhms", Series=RC, Size / Dimension="0.039\" L x 0.020\" W (1.00mm x 0.50mm)", Supplier 1=DigiKey
R6: library part RC0402FR-073K32L, "RES SMD 3.32K OHM 1% 1/16W 0402", Device Package="0402 (1005 Metric)", Manufacturer=Yageo, Operating Temperature="-55°C ~ 155°C", Power (Watts)="0.063W, 1/16W", Supplier Device Package=0402, Supplier Part Number 1=311-3.32KLRCT-ND, Temperature Coefficient=±100ppm/°C, Tolerance=±1%, ComponentLink1Description=Datasheet, ComponentLink1URL=https://www.yageo.com/upload/media/product/productsearch/datasheet/rchip/PYu-RC_Group_51_RoHS_L_10.pdf, ComponentLink2Description="DigiKey Link", ComponentLink2URL=http://digikey.com/product-detail/en/yageo/RC0402FR-073K32L/311-3.32KLRCT-ND/2827944, Composition="Thick Film", Features="Moisture Resistant", Height - Seated (Max)="0.016\" (0.40mm)", LastUpdated="2.09.2020 01:07:35", Lifecycle Status=Active, Minimum Order=1, Number of Terminations=2, Package / Case="0402 (1005 Metric)", Packaging=CutTape, Part Number=RC0402FR-073K32L, Part Status=Active, PartId=17991, Price=0.10, Resistance="3.32 kOhms", Series=RC, Size / Dimension="0.039\" L x 0.020\" W (1.00mm x 0.50mm)", Supplier 1=DigiKey
R8: library part ERJ-2GEJ104X, "RES SMD 100K OHM 5% 1/10W 0402", Device Package="0402 (1005 Metric)", Manufacturer="Panasonic Electronic Components", Operating Temperature="-55°C ~ 155°C", Power (Watts)="0.1W, 1/10W", Ratings=AEC-Q200, Supplier Device Package=0402, Supplier Part Number 1=P100KJCT-ND, Temperature Coefficient=±200ppm/°C, Tolerance=±5%, ComponentLink1Description=Datasheet, ComponentLink1URL=https://b2b-api.panasonic.eu/file_stream/pids/fileversion/1242, ComponentLink2Description="DigiKey Link", ComponentLink2URL=http://digikey.com/product-detail/en/panasonic-electronic-components/ERJ-2GEJ104X/P100KJCT-ND/146730, Composition="Thick Film", Features="Automotive AEC-Q200", Height - Seated (Max)="0.016\" (0.40mm)", LastUpdated="2.09.2020 01:07:36", Lifecycle Status=Active, Minimum Order=1, Number of Terminations=2, Package / Case="0402 (1005 Metric)", Packaging=CutTape, Part Number=ERJ-2GEJ104X, Part Status=Active, PartId=17613, Price=0.10, Resistance="100 kOhms", Series=ERJ, Size / Dimension="0.039\" L x 0.020\" W (1.00mm x 0.50mm)", Supplier 1=DigiKey
R9: library part RC0402FR-074K3L, "RES SMD 4.3K OHM 1% 1/16W 0402", Device Package="0402 (1005 Metric)", Manufacturer=Yageo, Operating Temperature="-55°C ~ 155°C", Power (Watts)="0.063W, 1/16W", Supplier Device Package=0402, Supplier Part Number 1=311-4.30KLRCT-ND, Temperature Coefficient=±100ppm/°C, Tolerance=±1%, ComponentLink1Description=Datasheet, ComponentLink1URL=https://www.yageo.com/upload/media/product/productsearch/datasheet/rchip/PYu-RC_Group_51_RoHS_L_10.pdf, ComponentLink2Description="DigiKey Link", ComponentLink2URL=http://digikey.com/product-detail/en/yageo/RC0402FR-074K3L/311-4.30KLRCT-ND/729551, Composition="Thick Film", Features="Moisture Resistant", Height - Seated (Max)="0.016\" (0.40mm)", LastUpdated="2.09.2020 01:07:27", Lifecycle Status=Active, Minimum Order=1, Number of Terminations=2, Package / Case="0402 (1005 Metric)", Packaging=CutTape, Part Number=RC0402FR-074K3L, Part Status=Active, PartId=20831, Price=0.10, Resistance="4.3 kOhms", Series=RC, Size / Dimension="0.039\" L x 0.020\" W (1.00mm x 0.50mm)", Supplier 1=DigiKey
R11: library part ERJ-2RKF2002X, "RES SMD 20K OHM 1% 1/10W 0402", Device Package="0402 (1005 Metric)", Manufacturer="Panasonic Electronic Components", Operating Temperature="-55°C ~ 155°C", Power (Watts)="0.1W, 1/10W", Ratings=AEC-Q200, Supplier Device Package=0402, Supplier Part Number 1=P20.0KLCT-ND, Temperature Coefficient=±100ppm/°C, Tolerance=±1%, ComponentLink1Description=Datasheet, ComponentLink1URL=https://industrial.panasonic.com/cdbs/www-data/pdf/RDA0000/AOA0000C304.pdf, ComponentLink2Description="DigiKey Link", ComponentLink2URL=http://digikey.com/product-detail/en/panasonic-electronic-components/ERJ-2RKF2002X/P20.0KLCT-ND/194250, Composition="Thick Film", Features="Automotive AEC-Q200", Height - Seated (Max)="0.016\" (0.40mm)", LastUpdated="2.09.2020 01:07:36", Lifecycle Status=Active, Minimum Order=1, Number of Terminations=2, Package / Case="0402 (1005 Metric)", Packaging=TapeAndReel, Part Number=ERJ-2RKF2002X, Part Status=Active, PartId=17620, Price=0.01, Resistance="20 kOhms", Series=ERJ, Size / Dimension="0.039\" L x 0.020\" W (1.00mm x 0.50mm)", Supplier 1=DigiKey
TP1 TP2 TP3 TP4 TP5 TP6 TP7 TP8 TP9 TP10 TP11 TP12 TP13 TP14 TP15 TP16 TP17: "THRU HOLE MOUNT TEST POINTS", Supplier Part Number 1=36-5012-ND, Supplier 1=Digi-Key, Supplier 2=Mouser, Supplier Part Number 2=534-5012

## Via types
v1: diameter 0.5, hole 0.2, Top Layer to Bottom Layer, tented both sides, 464 vias
v2: diameter 0.5, hole 0.2, Top Layer to Bottom Layer, 30 vias

## Nets (pads, with @x,y where several pads share a name; then routed paths per layer and width w, separated by ;. In a path a pad name is that pad's centre, name@x,y a point inside that pad or via, vN(x,y) a via of type N, cw(c..) or ccw(c..) an arc to the next point about the centre after c; other vN are vias at no path point)
GND: C1.1 C2.1 C3.1 C4.1 C5.1 C6.1 C7.1 C10.1 C11.1 C12.1 C13.1 C14.1 C17.1 C18.1 C19.1 C22.2 C23.1 C24.1 C25.1 C28.1 C29.1 C30.1 C31.1 C34.2 C35.1 C36.1 C37.1 C40.1 C41.1 C43.1 C44.1 IC1.2 IC1.4 IC1.5 IC1.7 IC2.2 IC3.1 IC3.3 IC3.4 IC3.6 IC3.8 IC3.9 IC4.3 IC4.4 IC4.6 IC4.8 IC4.9 IC5.3 IC5.4 IC5.5 IC5.8 IC5.9 IC6.3 IC6.4 IC6.6 IC6.8 IC6.9 J1.2 J2.2 J3.2 J4.2 J5.2 J6.2 J7.2 J8.2 J9.2 J10.2 J11.2 J12.2 J13.2 J14.2 R2.1 R5.1 R8.1 R11.1 TP2.1 TP4.1 TP7.1 TP10.1 TP13.1 TP16.1
  other v1: 5.75,1.75 44.25,1.75 8,2 11,2 14,2 17,2 20,2 23,2 26,2 29,2 32,2 35,2 38,2 41,2 5.75,2.75 44.25,2.75 29,3.25 26.75,3.5 27.75,3.5 21.75,4.25 24.5,4.5 25.5,4.5 24.5,5.25 25.5,5.25 21.75,5.75 24.5,6 25.5,6 28.25,6 29,6 29.75,6 28.25,6.75 29,6.75 29.75,6.75 5.75,7.25 44.25,7.25 34,7.6 8,8 11,8 14,8 17,8 23,8 26,8 35,8 38,8 41,8 5.75,8.25 44.25,8.25 22.5,8.5 28,8.5 34,8.7 20.4,9.3 21.5,9.3 27.1,9.3 34,9.8 34,10.9 3.5,11 6.5,11 9.5,11 12.5,11 15.5,11 21.5,11 24.5,11 27.5,11 36.5,11 39.5,11 42.5,11 45.5,11 48.5,11 2,14 5,14 8,14 11,14 14,14 17,14 20,14 23,14 26,14 29,14 32,14 35,14 38,14 41,14 44,14 47,14 5.75,16.75 44.25,16.75 6.5,17 9.5,17 12.5,17 15.5,17 18.5,17 21.5,17 24.5,17 27.5,17 30.5,17 33.5,17 36.5,17 39.5,17 42.5,17 5.75,17.75 44.25,17.75 25,18.75 5.75,22.25 44.25,22.25 6.5,23 9.5,23 12.5,23 15.5,23 18.5,23 21.5,23 27.5,23 30.7,23 33.5,23 36.5,23 39.5,23 42.5,23 5.75,23.25 44.25,23.25 30.7,24.1 30.7,25.2 2,26 5,26 8,26 11,26 14,26 17,26 23,26 32,26 35,26 38,26 41,26 44,26 47,26 30.7,26.3 3.5,29 6.5,29 9.5,29 12.5,29 15.5,29 18.5,29 21.5,29 24.5,29 27.5,29 30.5,29 36.5,29 39.5,29 42.5,29 45.5,29 48.5,29 27,30.9 5.75,31.75 44.25,31.75 8,32 11,32 14,32 17,32 20,32 23,32 26,32 32,32 35,32 38,32 41,32 5.75,32.75 44.25,32.75 23.5,34.2 26.6,34.4 26.6,35.7 23.4,35.8 5.75,37.25 44.25,37.25 32,37.6 8,38 11,38 14,38 17,38 20,38 23,38 26,38 29,38 35,38 38,38 41,38 5.75,38.25 44.25,38.25 32,38.7 32,39.8 3.5,41 6.5,41 9.5,41 12.5,41 15.5,41 18.5,41 21.5,41 24.5,41 27.5,41 30.5,41 33.5,41 36.5,41 39.5,41 42.5,41 45.5,41 48.5,41 2,44 5,44 8,44 11,44 14,44 17,44 20,44 23,44 26,44 29,44 35,44 38,44 41,44 44,44 47,44 27,45.8 5.75,46.75 44.25,46.75 6.5,47 9.5,47 12.5,47 15.5,47 18.5,47 21.5,47 24.5,47 33.5,47 36.5,47 39.5,47 42.5,47 5.75,47.75 44.25,47.75 23.4,48.7 26.7,48.7 23.4,49.3 26.7,49.4 26.7,50.6 24.2,51.7 5.75,52.25 44.25,52.25 29.7,52.5 6.5,53 9.5,53 12.5,53 15.5,53 18.5,53 21.5,53 30.5,53 33.5,53 36.5,53 39.5,53 42.5,53 5.75,53.25 44.25,53.25 29.7,53.6 29.7,54.7 2,56 5,56 8,56 11,56 14,56 17,56 23,56 29,56 32,56 35,56 38,56 41,56 44,56 47,56 3.5,59 6.5,59 9.5,59 12.5,59 15.5,59 18.5,59 21.5,59 24.5,59 27.5,59 30.5,59 36.5,59 39.5,59 42.5,59 45.5,59 48.5,59 27.4,60.6 5.75,61.75 44.25,61.75 8,62 11,62 14,62 17,62 20,62 23,62 26,62 32,62 35,62 38,62 41,62 5.75,62.75 44.25,62.75 24.1,63.3 25.9,63.3 23.4,64.2 26.7,65.7 29.7,67 24.7,67.1 5.75,67.25 44.25,67.25 8,68 11,68 14,68 17,68 20,68 26,68 32,68 35,68 38,68 41,68 29.7,68.1 5.75,68.25 44.25,68.25 29.7,69.2 3.5,71 6.5,71 9.5,71 12.5,71 15.5,71 18.5,71 21.5,71 27.5,71 30.5,71 33.5,71 36.5,71 39.5,71 42.5,71 45.5,71 48.5,71 2,74 5,74 8,74 11,74 14,74 17,74 20,74 23,74 26,74 29,74 35,74 38,74 41,74 44,74 47,74 27.1,75.4 5.75,76.75 44.25,76.75 6.5,77 9.5,77 12.5,77 15.5,77 18.5,77 21.5,77 24.5,77 30.5,77 33.5,77 36.5,77 39.5,77 42.5,77 5.75,77.75 44.25,77.75 24.1,78.3 22,78.5 23.3,78.5 23.3,79.2 26.7,79.3 26.7,80.8 24,81.7 29.4,81.9 5.75,82.25 44.25,82.25 24.8,82.4 6.5,83 9.5,83 12.5,83 15.5,83 18.5,83 21.5,83 29.4,83 30.5,83 33.5,83 36.5,83 39.5,83 42.5,83 5.75,83.25 44.25,83.25 29.4,84.1 2,86 5,86 8,86 11,86 14,86 17,86 23,86 29,86 32,86 35,86 38,86 41,86 44,86 47,86 3.5,89 6.5,89 9.5,89 12.5,89 15.5,89 18.5,89 21.5,89 24.5,89 27.5,89 30.5,89 33.5,89 36.5,89 39.5,89 42.5,89 45.5,89 48.5,89 5.75,91.75 44.25,91.75 8,92 11,92 14,92 17,92 20,92 23,92 26,92 29,92 32,92 35,92 38,92 41,92 5.75,92.75 44.25,92.75 21.6,93.5 22.4,93.5 27.6,93.5 28.4,93.5 5.75,97.25 44.25,97.25 8,98 11,98 14,98 17,98 20,98 23,98 26,98 29,98 32,98 35,98 38,98 41,98 5.75,98.25 44.25,98.25
  other v2: 25,19.7 25,20.375 25,21.05 24.4,21.7 25,21.7 25.6,21.7 24.4,22.3 25,22.3 25.6,22.3 24.4,22.9 25,22.9 25.6,22.9 24.4,23.5 25,23.5 25.6,23.5 24.4,24.1 25,24.1 25.6,24.1 25,34.2 25,34.8 25,35.4 25,49.15 25,49.75 25,50.35 25,64.15 25,64.75 25,65.35 25,79.15 25,79.75 25,80.35
NetC8_1: C8.1 IC1.3 | length 9.5
  Top Layer w0.33: C8.1 13.405,4.985 22.89,4.985 IC1.3
NetC8_2: C8.2 J1.1 | length 9.8
  Top Layer w0.33: J1.1 C8.2
NetC9_1: C9.1 C10.2 IC1.6 L1.1 | length 9.5
  Top Layer w0.33: IC1.6 L1.1 30.812,4.987 36.597,4.987 C9.1
NetC9_2: C9.2 J2.1 | length 9.8
  Top Layer w0.33: C9.2 J2.1
NetC15_1: C15.1 IC2.1 | length 10.1
  Top Layer w0.33: C15.1 23.45,20 IC2.1
NetC15_2: C15.2 J3.1 | length 9.8
  Top Layer w0.33: J3.1 C15.2
NetC16_1: C16.1 J4.1 | length 9.8
  Top Layer w0.33: C16.1 J4.1
NetC16_2: C16.2 IC2.3 L2.1 | length 10.1
  Top Layer w0.33: IC2.3 L2.1 29.025,20.025 36.535,20.025 C16.2
NetC20_1: C20.1 J5.1 | length 9.8
  Top Layer w0.33: J5.1 C20.1
NetC20_2: C20.2 IC3.2 | length 10.7
  Top Layer w0.33: C20.2 13.43,35.04 IC3.2@24.075,35.04
NetC21_1: C21.1 IC3.7 L3.1 | length 10.7
  Top Layer w0.33: IC3.7 25.919,35.045 28.13,35.045 L3.1 28.155,35.02 36.59,35.02 C21.1
NetC21_2: C21.2 J6.1 | length 9.8
  Top Layer w0.33: C21.2 J6.1
NetC26_1: C26.1 J7.1 | length 13.7
  Top Layer w0.33: J7.1 C26.1
NetC26_2: C26.2 IC4.2 | length 6.8
  Top Layer w0.33: C26.2 IC4.2
NetC27_1: C27.1 IC4.7 L4.1 | length 8.1
  Top Layer w0.33: IC4.7 L4.1 C27.1
NetC27_2: C27.2 J8.1 | length 12.4
  Top Layer w0.33: C27.2 J8.1
NetC32_1: C32.1 J9.1 | length 9.8
  Top Layer w0.33: J9.1 C32.1
NetC32_2: C32.2 IC5.2 | length 10.7
  Top Layer w0.33: C32.2 IC5.2
NetC33_1: C33.1 IC5.7 L5.1 | length 10.7
  Top Layer w0.33: IC5.7 L5.1 C33.1
NetC33_2: C33.2 J10.1 | length 9.8
  Top Layer w0.33: C33.2 J10.1
NetC38_1: C38.1 J11.1 | length 9.8
  Top Layer w0.33: J11.1 C38.1
NetC38_2: C38.2 C40.2 IC6.2 | length 10.7
  Top Layer w0.33: C38.2 C40.2 IC6.2
NetC39_1: C39.1 IC6.7 L6.1 | length 10.7
  Top Layer w0.33: IC6.7 L6.1 C39.1
NetC39_2: C39.2 C41.2 J12.1 | length 9.8
  Top Layer w0.33: C39.2 C41.2 J12.1
NetC42_1: C42.1 C44.2 J14.1 | length 21.8
  Top Layer w0.33: C42.1 C44.2 J14.1
NetC42_2: C42.2 C43.2 J13.1 | length 21.8
  Top Layer w0.33: J13.1 C43.2 C42.2
NetR1_2: IC3.5 R1.2 R2.2 | length 3
  Top Layer w0.2: IC3.5 26.005,34.05 26.844,33.211 26.844,33.016 R2.2 R1.2
NetR3_1: IC4.1 R3.1 | length 2.5
  Top Layer w0.3: R3.1 23,50.9 23.4,50.5 IC4.1
NetR4_2: IC4.5 R4.2 R5.2 | length 3.3
  Top Layer w0.3: IC4.5 25.885,48.215 26.325,47.775 R5.2 R4.2
NetR6_1: IC5.1 R6.1 | length 1.9
  Top Layer w0.3: R6.1 22.8,66.65 23.93,65.52 23.93,65.5 IC5.1
NetR7_2: IC5.6 R7.2 R8.2 | length 4.1
  Top Layer w0.3: IC5.6 26.4,64.5 26.7,64.2 26.7,63.35 27.4,62.65 R8.2 R7.2
NetR9_1: IC6.1 R9.1 | length 2.3
  Top Layer w0.3: R9.1 22.8,82.05 23.93,80.92 23.93,80.5 IC6.1
NetR10_2: IC6.5 R10.2 R11.2 | length 3.3
  Top Layer w0.3: IC6.5 26.07,79 26.07,78.48 27.1,77.45 R11.2 R10.2
VCC1: C3.2 C4.2 C5.2 C6.2 C7.2 IC1.8 L1.2 TP3.1 | length 14.7
  Top Layer w0.3: IC1.8 C3.2 27.142,7.617 32.317,7.617 C4.2 C5.2 C6.2 C7.2 31.125,10.875 TP3.1 ; L1.2 30.8,7.575
VCC2: C11.2 C12.2 C13.2 C14.2 L2.2 TP5.1 | length 9.5
  Top Layer w0.3: TP5.1 24.625,26.375 28.935,26.375 C14.2 C13.2 C12.2 C11.2 29.06,21.51 L2.2
VCC3: C17.2 C18.2 C19.2 L3.2 TP8.1 | length 12.4
  Top Layer w0.3: TP8.1 22.929,39.87 30.164,39.87 C19.2 C18.2 C17.2 29.399,37.541 28.299,36.441 L3.2
VCC4: C22.1 C23.2 C24.2 C25.2 L4.2 R3.2 TP11.1 | length 11.6
  Top Layer w0.33: R3.2 23.033,53.308 24.168,53.308 C22.1 25.87,53.34 27.265,54.735 ; TP11.1 27.265,54.735 ; L4.2 28.06,51.34 C23.2 C24.2 C25.2 28.025,54.735 27.265,54.735
VCC5: C28.2 C29.2 C30.2 C31.2 L5.2 R6.2 TP14.1 | length 11.8
  Top Layer w0.3: R6.2 22.832,67.907 23.867,67.907 C28.2 24.84,67.94 26.1,69.2 ; TP14.1 25.5,69.8 26.1,69.2 ; L5.2 28.03,65.85 28.03,66.97 C29.2 C30.2 C31.2 26.1,69.2
VCC6: C34.1 C35.2 C36.2 C37.2 L6.2 R9.2 TP17.1 | length 11.9
  Top Layer w0.3: R9.2 22.832,83.307 23.968,83.307 C34.1 25.74,83.34 26.5,84.1 ; TP17.1 25.5,85.1 26.5,84.1 ; L6.2 27.73,80.85 27.73,81.87 C35.2 C36.2 C37.2 26.5,84.1
VCTRL1: C1.2 C2.2 IC1.1 TP1.1 | length 9.5
  Top Layer w0.3: TP1.1 18.5,8.9 19.765,7.635 C1.2 C2.2 21.5,6.876 21.676,6.7 21.7,6.7 22.11,6.29 22.885,6.29 IC1.1
VCTRL3: R1.1 TP6.1 | length 4.9
  Top Layer w0.2: R1.1 30.834,31.666 TP6.1
VCTRL4: R4.1 TP9.1 | length 5
  Top Layer w0.3: R4.1 30.875,46.625 TP9.1
VCTRL5: R7.1 TP12.1 | length 4.5
  Top Layer w0.3: R7.1 31.075,61.425 TP12.1
VCTRL6: R10.1 TP15.1 | length 4.8
  Top Layer w0.3: R10.1 31.275,76.225 TP15.1

## Polygon pours and split planes (outlines as drawn)
GND on Top Layer "GND_L01_P000" (solid, pour order 0): 0,0 50,0 50,100 0,100
GND on GND "GND_L02_P001" (solid, pour order 1): 0,0 50,0 50,100 0,100
GND on Bottom Layer "GND_L04_P002" (solid, pour order 2): 0,0 50,0 50,100 0,100

## Keep-outs
Keep-Out Layer:
  the board outline again, w0.2

## Other copper
Top Layer:
  pour cut-out: 27.2,80.75 28.2,80.75 28.2,80 27.2,80
  pour cut-out: 27.5,65.75 28.5,65.75 28.5,65 27.5,65
  pour cut-out: 30.166,6.434 30.176,6.444 31.46,6.444 31.46,4.978 31.416,4.934 30.166,4.934
  pour cut-out: 28.366,21.509 28.376,21.519 29.66,21.519 29.66,20.053 29.616,20.009 28.366,20.009
  pour cut-out: 27.366,51.339 27.376,51.349 28.66,51.349 28.66,49.883 28.616,49.839 27.366,49.839
  pour cut-out: 27.5,36.5 27.51,36.51 28.794,36.51 28.794,35.044 28.75,35 27.5,35

## Silkscreen, mask and mechanical layers (free items; w line width, h text height)
Top Overlay:
  lines w0.2: 2.5,12.5 15,12.5 15,15 32.5,15 32.5,12.5 47.5,12.5 ; 2.5,27.5 15,27.5 15,30 25,30 27.5,30 27.5,27.5 47.5,27.5 ; 2.5,42.5 47.5,42.5 ; 2.5,57.5 15,57.5 15,60 27.5,60 30,57.5 47.5,57.5 ; 2.5,72.5 15,72.5 15,75 27.5,75 30,72.5 47.5,72.5 ; 2.5,87.5 15,87.5 15,90 27.5,90 30,87.5 47.5,87.5
  lines w0.5: 11,98 14,98 ; 13,97 14,98 ; 13,99 14,98
  text "Reference" at 33.928,96.972 h1.8
  text "QPL9503" at 34.487,84.506 h1.8
  text "QPL9547" at 34.45,69.506 h1.8
  text "QPL9058" at 34.441,54.506 h1.8
  text "QPA9127" at 34.246,39.506 h1.8
  text "ADL5611" at 34.568,24.468 h1.8
  text "HMC326" at 34.487,9.468 h1.8
Top Solder:
  rectangle: 30,94 44,96
  rectangle: 6,94 20,96
  rectangle: 41,79 44,81
  rectangle: 30,79 35,81
  rectangle: 15,79 20,81
  rectangle: 6,79 11,81
  rectangle: 19,49 22,51
  rectangle: 6,49 15,51
  rectangle: 6,64 11,66
  rectangle: 15,64 22,66
  rectangle: 29,64 35,66
  rectangle: 39,64 44,66
  rectangle: 30,49 33,51
  rectangle: 36,49 44,51
  rectangle: 39,34 44,36
  rectangle: 30,34 35,36
  rectangle: 15,34 22,36
  rectangle: 6,34 11,36
  rectangle: 6,19 11,21
  rectangle: 15,19 22,21
  rectangle: 31,19 35,21
  rectangle: 39,19 44,21
  rectangle: 39,4 44,6
  rectangle: 32,4 35,6
  rectangle: 15,4 20,6
  rectangle: 6,4 11,6